# Altium PCB practus_floor.PcbDoc
Units mm, origin at the board's own origin, x right, y up, seen from the top; angles counter-clockwise.
Board outline 197.24 x 97.54 mm, 2 copper layers (Top Layer, Bottom Layer); 43 components, 20 nets, 181 pads, 10 vias.
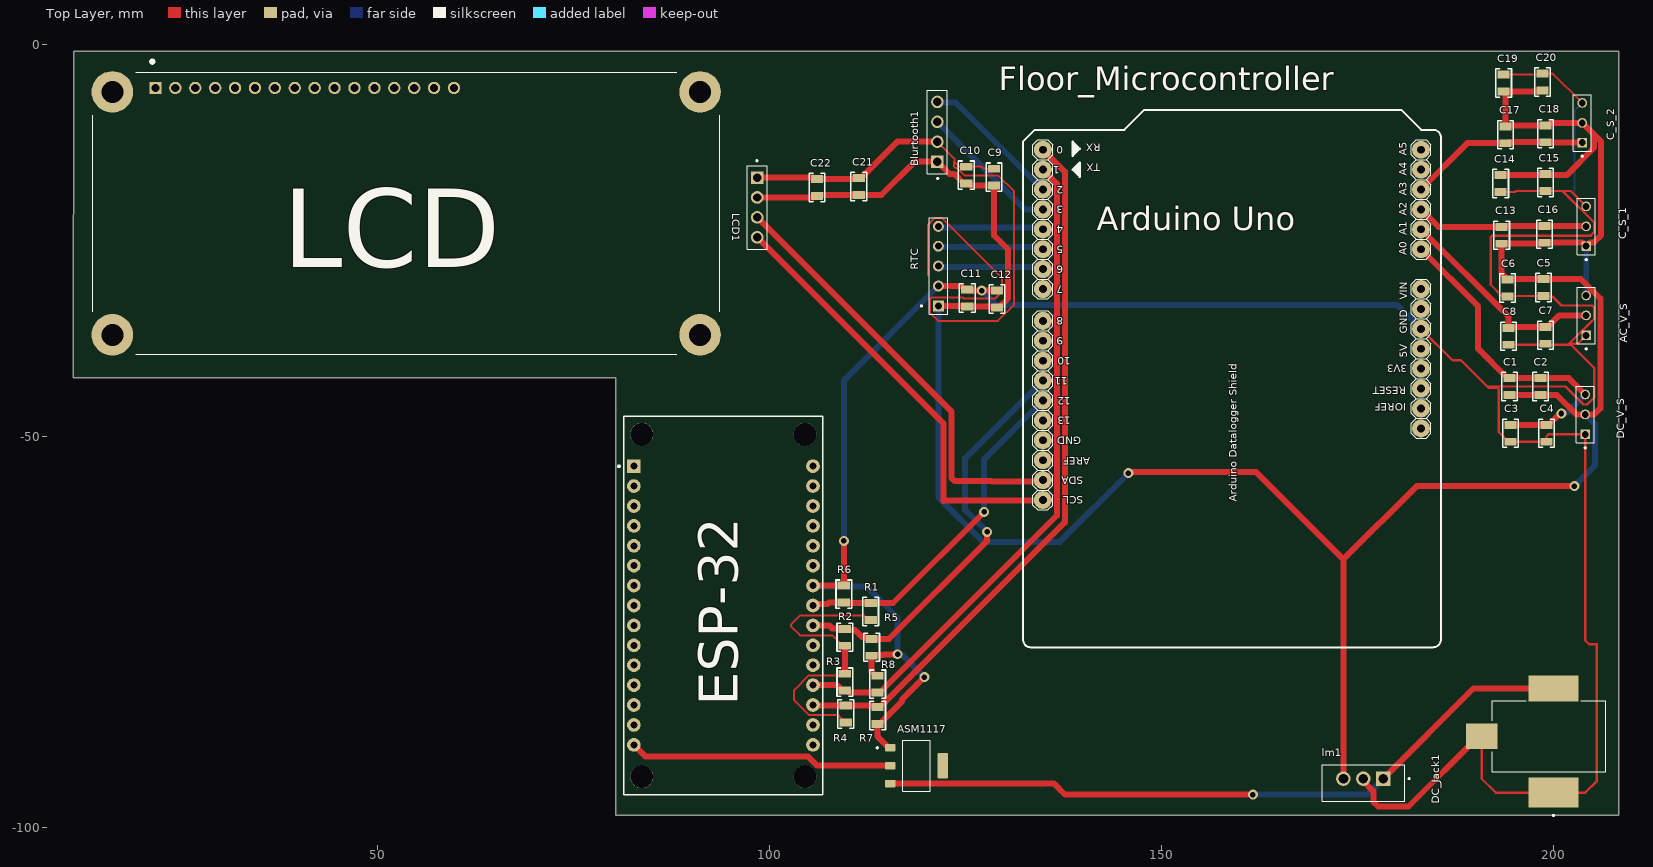
[diagram p0: Top Layer view]
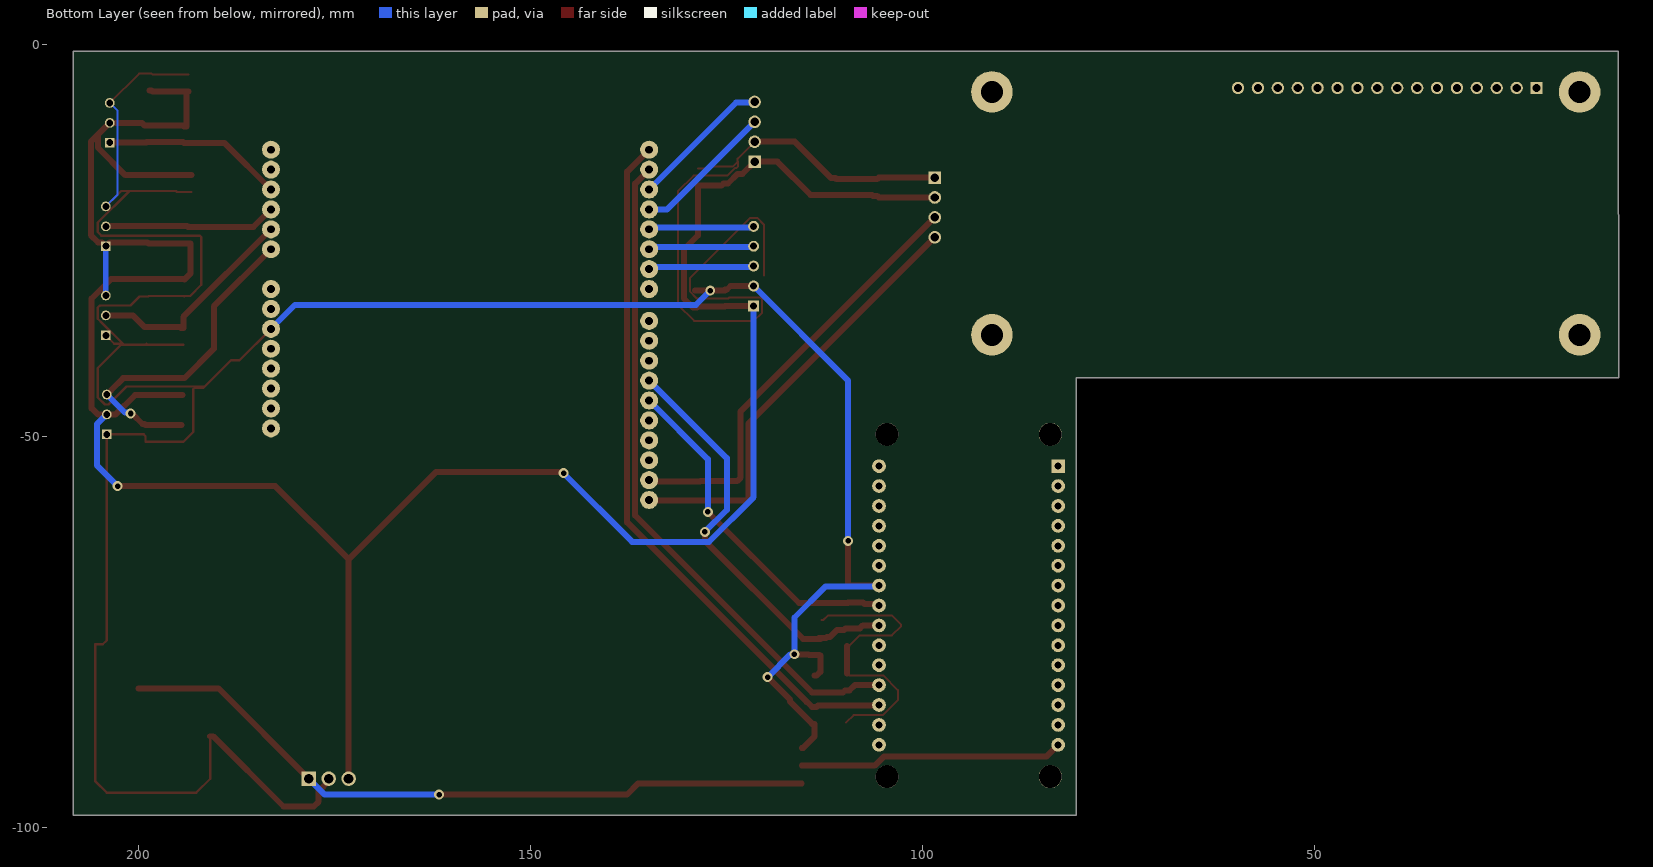
[diagram p1: Bottom Layer view, seen from below]
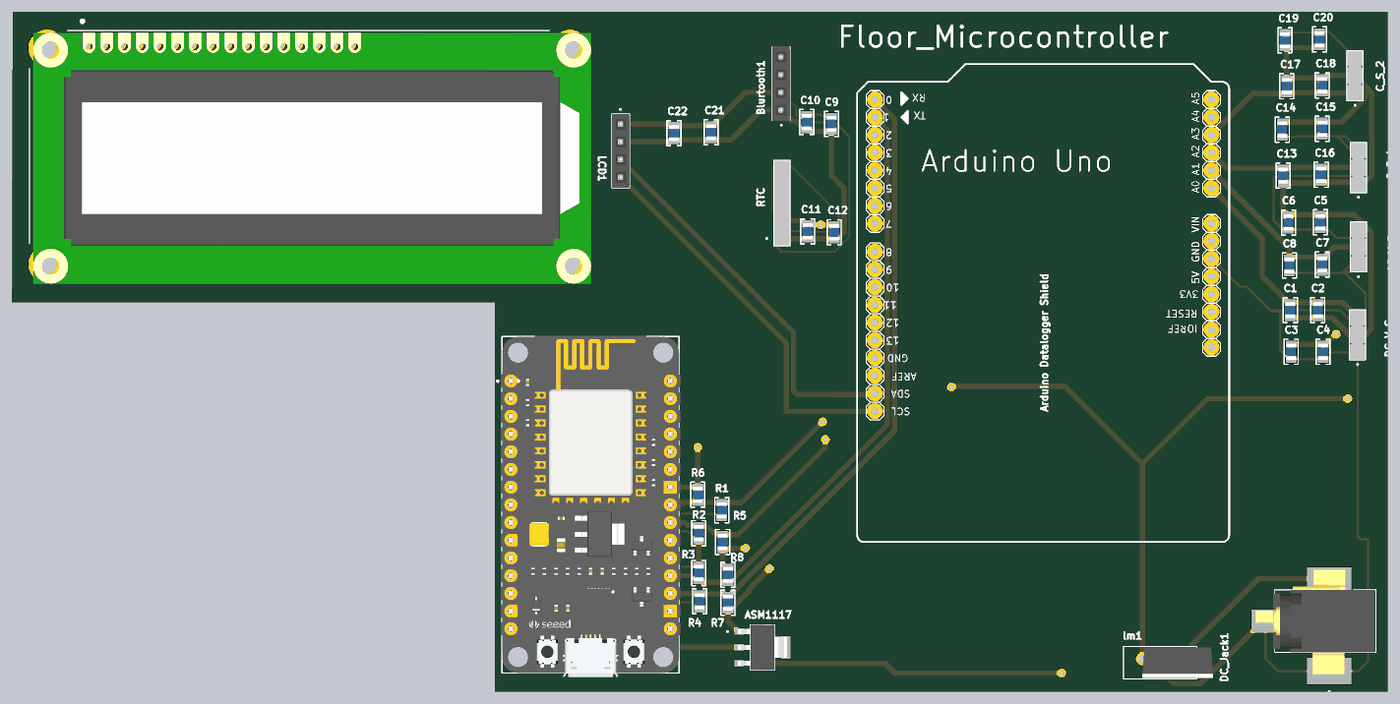
[diagram p2: 3D render of the assembled board from above, using the file's embedded part models]

## Layer stack, top to bottom
Top Solder: solder mask 0.0102, Solder Resist, Dk 3.5
Top Layer: signal copper 0.0356
Dielectric 1: dielectric 0.32, FR-4, Dk 4.8
Bottom Layer: signal copper 0.0356
Bottom Solder: solder mask 0.0102, Solder Resist, Dk 3.5

## Board outline
11.132,-42.561 80.376,-42.561 80.376,-98.425 208.376,-98.425 208.376,-0.889 11.225,-0.889

## Design rules (kind name [scope] priority, off if disabled: settings)
Clearance [All] p1: gap=0.254 ignorepadtopadclearanceinfootprint=TRUE except(0: Arc-Hole Track-Hole SMDPad-Hole THPad-Hole Via-Hole Fill-Hole Poly-Hole Region-Hole Text-Hole)
PolygonConnect [All] p1: connectstyle=Relief reliefconductorwidth=0.254 reliefentries=4 polygonreliefangle="90 Angle" airgapwidth=0.254
RoutingVias [All] p1: holewidth=0.711 width=1.27 viastyle="Through Hole" minholewidth=0.711 minwidth=1.27 maxholewidth=0.711 maxwidth=1.27
SolderMaskExpansion [All] p1: expansion=0.102 istentingtop=FALSE
Width [All] p1: maxlimit=0.762 minlimit=0.254 preferedwidth=0.254 minimp=50.000000 maximp=50.000000 favimp=50.000000
30 further rules are at their usual default settings.

## Components (designator, comment, footprint, x,y, rotation, side; value= is the part's Value field where it differs from the comment)
AC_V_S "5-146285-3" TE_5-146285-3 204.216,-37.152 r90 top
"Arduino Uno" "ARDUINO UNO" "ARDUINO UNO" 159.134,-40.905 r90 top
ASM1117 "AMS1117-3.3" SOT229P700X180-4N 118.745,-92.075 r0 top
Blurtooth1 "PPTC041LFBN-RC" SULLINS_PPTC041LFBN-RC 121.412,-11.176 r90 top
C1 "" 0805 194.437,-43.688 r90 top value=100pF
C2 "" 0805 198.374,-43.688 r90 top value=100pF
C3 "" 0805 194.564,-49.657 r90 top value=100pF
C4 "" 0805 199.136,-49.657 r90 top value=100pF
C5 "" 0805 198.755,-31.056 r270 top value=100pF
C6 "" 0805 194.183,-31.115 r270 top value=100pF
C7 "" 0805 199.009,-37.152 r270 top value=100pF
C8 "" 0805 194.31,-37.279 r270 top value=100pF
C9 "" 0805 128.651,-16.959 r270 top value=100pF
C10 "" 0805 125.095,-16.705 r270 top value=100pF
C11 "" 0805 125.222,-32.385 r90 top value=100pF
C12 "" 0805 129.032,-32.512 r90 top value=100pF
C13 "" 0805 193.421,-24.384 r270 top value=100pF
C14 "" 0805 193.294,-17.78 r90 top value=100pF
C15 "" 0805 199.009,-17.653 r90 top value=100pF
C16 "" 0805 198.882,-24.257 r270 top value=100pF
C17 "" 0805 193.929,-11.557 r270 top value=100pF
C18 "" 0805 199.009,-11.43 r270 top value=100pF
C19 "" 0805 193.675,-4.953 r270 top value=100pF
C20 "" 0805 198.628,-4.826 r270 top value=100pF
C21 "" 0805 111.379,-18.161 r90 top value=100pF
C22 "" 0805 106.045,-18.288 r90 top value=100pF
C_S_1 "5-146285-3" TE_5-146285-3 204.216,-25.781 r90 top
C_S_2 "5-146285-3" TE_5-146285-3 203.708,-12.573 r90 top
DC_Jack1 "RASM722X" SWITCHCRAFT_RASM722X 200.025,-88.314 r90 top
DC_V_S "5-146285-3" TE_5-146285-3 204.089,-49.784 r90 top
ESP-32 "113990105" FP-113990105-MFG 94.107,-71.628 r0 top (schematic designator nodemcu1)
LCD "Comment" LCD_NHD-14432WG-BTFH-V#T 54.179,-21.884 r0 top
LCD1 "PPTC041LFBN-RC" SULLINS_PPTC041LFBN-RC 98.425,-20.828 r270 top
lm1 "LM7805CT/NOPB" TO254P1054X470X2600-3 178.308,-93.726 r180 top
R1 "" 0805 112.903,-72.39 r270 top value=1K
R2 "" 0805 109.601,-75.692 r270 top value=1K
R3 "" 0805 109.601,-81.407 r90 top value=1K
R4 "" 0805 109.728,-85.471 r270 top value=1K
R5 "" 0805 113.03,-76.962 r90 top value=1K
R6 "" 0805 109.474,-70.172 r270 top value=1K
R7 "" 0805 113.792,-85.657 r90 top value=1K
R8 "" 0805 113.792,-81.661 r270 top value=1K
RTC "87224-5" TE_87224-5 121.539,-28.321 r90 top

## Footprints (in the part's own frame and the unit in brackets; to place one, negate y for a bottom-side part, rotate by r counter-clockwise, add the part's x,y. Pads: shape width x height; smd on the part's side, far side on the other; paste and mask are expansions set on the pad)
0805 [mm]
  rect 1x1.55 smd: 1(-1.075,0) 2(1.075,0)
  silkscreen extent -1.8,-1 1.8,1, body extent -1.15,-0.7 1.15,0.7, height 0.6
"ARDUINO UNO" [mm]
  round 2.3 hole 1: 0(27.44,24.26) 1(24.9,24.26) 2(22.36,24.26) 3(19.82,24.26) 3.3V(-0.5,-24) 4(17.28,24.26) 5(14.74,24.26) 5V(2.04,-24) 6(12.2,24.26) 7(9.66,24.26) 8(5.596,24.26) 9(3.056,24.26) 10(0.516,24.26) 11(-2.024,24.26) 12(-4.564,24.26) 13(-7.104,24.26) A0(14.74,-24) A1(17.28,-24) A2(19.82,-24) A3(22.36,-24) A4(24.9,-24) A5(27.44,-24) AREF(-12.184,24.26) GND1(7.12,-24) GND2(4.58,-24) GND3(-9.644,24.26) IOREF(-5.58,-24) NC(-8.12,-24) RST(-3.04,-24) SCL(-17.264,24.26) SDA(-14.724,24.26) Vin(9.66,-24)
  silkscreen extent -36.06,-26.54 32.52,26.8
FP-113990105-MFG [mil]
  rect 69.02x69.02 hole 35 paste-39370.1 mask+0: 1(-450,700)
  round 69.02 hole 35 paste-39370.1 mask+0: 2(-450,600) 3(-450,500) 4(-450,400) 5(-450,300) 6(-450,200) 7(-450,100) 8(-450,0) 9(-450,-100) 10(-450,-200) 11(-450,-300) 12(-450,-400) 13(-450,-500) 14(-450,-600) 15(-450,-700) 16(450,-700) 17(450,-600) 18(450,-500) 19(450,-400) 20(450,-300) 21(450,-200) 22(450,-100) 23(450,0) 24(450,100) 25(450,200) 26(450,300) 27(450,400) 28(450,500) 29(450,600) 30(450,700)
  round 115 hole 115 unplated paste-39370.1 mask+0: ""(-410,-860) ""(-410,860) ""(410,-860) ""(410,860)
  silkscreen extent -530,-950 500,950, body extent -511,-978 511,958, height 10
LCD_NHD-14432WG-BTFH-V#T [mm]
  rect 1.575x1.575 / inner round 1.575 / far side rect 1.575x1.575 hole 1.05: 1(-32.55,16.3)
  round 1.575 hole 1.05: 2(-30.01,16.3) 3(-27.47,16.3) 4(-24.93,16.3) 5(-22.39,16.3) 6(-19.85,16.3) 7(-17.31,16.3) 8(-14.77,16.3) 9(-12.23,16.3) 10(-9.69,16.3) 11(-7.15,16.3) 12(-4.61,16.3) 13(-2.07,16.3) 14(0.47,16.3) 15(3.01,16.3) 16(5.55,16.3)
  round 5.3 hole 2.8: S1(-38.05,15.8) S2(-38.05,-15.2) S3(36.95,15.8) S4(36.95,-15.2)
  silkscreen extent -40.55,-17.7 39.45,19.85, body extent -40,-18 40,18, height 10.2
SOT229P700X180-4N [mm]
  rrect15% 1.31x0.93 smd: 1(-3.345,2.29) 2(-3.345,0) 3(-3.345,-2.29)
  rrect15% 1.31x3.24 smd: 4(3.345,0)
  silkscreen extent -5.1,-3.25 1.75,3.25, body extent -3.5,-3.25 3.5,3.25, height 1.8
SULLINS_PPTC041LFBN-RC [mm]
  rect 1.605x1.605 / inner round 1.605 / far side rect 1.605x1.605 hole 1.07: 1(-3.81,0)
  round 1.605 hole 1.07: 2(-1.27,0) 3(1.27,0) 4(3.81,0)
  silkscreen extent -6.06,-1.27 5.33,1.27, body extent -5.33,-1.27 5.33,1.27, height 8.51
SWITCHCRAFT_RASM722X [mm]
  rect 3.81x6.35 smd: 1(-7.19,0)
  rect 3.3x4.06 smd: 2(0,9.14)
  rect 3.3x6.35 smd: 3(6.1,0)
  silkscreen extent -10.19,-6.7 4.5,7.81, body extent -7.6,-6.45 7.41,10.62, height 11.06
TE_5-146285-3 [mm]
  rect 1.24x1.24 hole 0.89: 1(0,0)
  round 1.24 hole 0.89: 2(2.54,0) 3(5.08,0)
  silkscreen extent -1.82,-1.17 6.15,1.17, body extent -1.07,-1.17 6.15,1.17, height 5.84
TE_87224-5 [mil]
  rect 55x55 hole 35: 1(-200,0)
  round 55 hole 35: 2(-100,0) 3(0,0) 4(100,0) 5(200,0)
  silkscreen extent -242,-46 242,89, body extent -242,-46 242,46, height 318
TO254P1054X470X2600-3 [mm]
  rect 1.86x1.86 / inner round 1.86 / far side rect 1.86x1.86 hole 1.24: 1(0,0)
  round 1.86 hole 1.24: 2(2.54,0) 3(5.08,0)
  silkscreen extent -3.41,-1.8 7.81,2.9, body extent -5.08,-1.64 5.08,2.72, height 20.4

## Part data
AC_V_S C_S_1 C_S_2 DC_V_S: Package=None, Availability=Unavailable, MP=5-146285-3, Price=None
ASM1117: "Sot223/Pkg 1-Amp 3.3-Volt Low Drop Out Voltage Regulatator", Package="SOT-223 Seeed Technology", Availability="Not in stock", Check_prices=https://www.snapeda.com/parts/AMS1117-3.3/Advanced+Monolithic+Systems/view-part/?ref=eda, MF="Advanced Monolithic Systems", MP=AMS1117-3.3, Price=None, SnapEDA_Link=https://www.snapeda.com/parts/AMS1117-3.3/Advanced+Monolithic+Systems/view-part/?ref=snap
Blurtooth1 LCD1: "4 Position Header Connector 0.100 (2.54mm) Through Hole Tin", Package=None, Check_prices=https://www.snapeda.com/parts/PPTC041LFBN-RC/Sullins+Connector+Solutions/view-part/?ref=eda, Digi-Key_Part_Number=S7002-ND, MF="Sullins Connector", MP=PPTC041LFBN-RC, Purchase-URL=https://pricing.snapeda.com/search/part/PPTC041LFBN-RC/?ref=eda, SnapEDA_Link=https://www.snapeda.com/parts/PPTC041LFBN-RC/Sullins+Connector+Solutions/view-part/?ref=snap
C1 C2 C3 C4 C5 C6 C7 C8 C9 C10 C11 C12 C13 C14 C15 C16 C17 C18 C19 C20 C21 C22: library part Cap, "Capacitor", LatestRevisionDate=17-Jul-2002, LatestRevisionNote="Re-released for DXP Platform.", PackageDescription="Radial Cap, Thru-Hole; 2 Leads; 0.3 in Pin Spacing", PackageReference=RAD-0.3, Published=8-Jun-2000, Publisher="Altium Limited"
DC_Jack1: "JACK SOCKET, DC; Gender:Jack; Current Rating:5A; Pin Diameter:2mm; Barrel Length:-; Connector Mounting:Surface Mount; Contact Termination Type:Solder; Barrel Inner Diameter:-; Barrel Outer Diameter:6.3mm; Voltage Rating:-; Product Range:-; SVHC:No SVHC (15-Jan-2018); Contact Termination:Solder; Termination Method:Solder; Voltage Rating VAC:250V", Package=None, Availability="In Stock", Check_prices=https://www.snapeda.com/parts/RASM722X/Switchcraft+Inc./view-part/?ref=eda, MF=Switchcraft, MP=RASM722X, Price=None, Purchase-URL=https://pricing.snapeda.com/search/part/RASM722X/?ref=eda, SnapEDA_Link=https://www.snapeda.com/parts/RASM722X/Switchcraft+Inc./view-part/?ref=snap
ESP-32: library part CMP-138991-000001-1, "NODEMCU V2 LUA BASED ESP8266 DEV", Frequency=2.4GHz, Series=-
lm1: "Linear Voltage Regulator IC Positive Fixed 1 Output 1.5A TO-220-3", Package="TO-220-3 ON Semiconductor", Availability="In Stock", Check_prices=https://www.snapeda.com/parts/LM7805CT/Onsemi/view-part/?ref=eda, MF="ON Semiconductor", MP=LM7805CT, Price=None, Purchase-URL=https://pricing.snapeda.com/search/part/LM7805CT/?ref=eda, SnapEDA_Link=https://www.snapeda.com/parts/LM7805CT/Onsemi/view-part/?ref=snap
R1 R2 R3 R4 R5 R6 R7 R8: library part Res1, "Resistor", LatestRevisionDate=17-Jul-2002, LatestRevisionNote="Re-released for DXP Platform.", PackageDescription="Axial Device, Thru-Hole; 2 Leads; 0.3 in Pin Spacing", PackageReference=AXIAL-0.3, Published=8-Jun-2000, Publisher="Altium Limited"
RTC: "Conn Unshrouded Header HDR 5 POS 2.54mm Solder ST Thru-Hole", Package=None, Availability=Good, Centerline_Pitch="2.54 mm[.1 in]", EU_RoHS_Compliance=Compliant, MF="TE Connectivity", MP=87224-5, Number_of_Positions=5, Price=None, Product_Type=Connector, Purchase-URL=https://pricing.snapeda.com/search/part/87224-5/?ref=eda, SnapEDA_Link=https://www.snapeda.com/parts/87224-5/TE%20Connectivity%20AMP%20Connectors/view-part/1233389/?ref=snap

## Via types
v1: diameter 1.27, hole 0.711, Top Layer to Bottom Layer, 10 vias

## Nets (pads, with @x,y where several pads share a name; then routed paths per layer and width w, separated by ;. In a path a pad name is that pad's centre, name@x,y a point inside that pad or via, vN(x,y) a via of type N, cw(c..) or ccw(c..) an arc to the next point about the centre after c; other vN are vias at no path point)
5v: AC_V_S.3 Blurtooth1.1 C1.1 C2.1 C5.1 C6.1 C9.2 C10.2 C11.1 C12.1 C13.2 C14.2 C15.2 C16.2 C17.1 C18.1 C19.2 C20.2 C21.1 C22.1 C_S_1.1 C_S_2.2 DC_V_S.2 LCD1.2 lm1.3 RTC.1 | length 331.2
  Top Layer w0.762: LCD1.2 105.575,-19.558 105.77,-19.363 C22.1 106.32,-19.363 106.447,-19.236 C21.1 114.257,-19.236 118.507,-14.986 Blurtooth1.1 122.96,-16.534 123.574,-16.534 124.82,-17.78 C10.2 125.37,-17.78 125.624,-18.034 C9.2 128.651,-24.407 130.442,-26.198 130.442,-32.452 129.307,-33.587 C12.1 128.757,-33.587 128.63,-33.46 C11.1 125.193,-33.43 121.569,-33.43 RTC.1 ; v1(145.796,-54.737) 145.923,-54.61 162.089,-54.61 173.228,-65.749 ; lm1.3 173.228,-65.749 ; C14.2 201.714,-16.705 205.232,-13.187 205.232,-11.557 ; C19.2 C19.2@193.81,-6.028 ; C1.1 C2.1 200.465,-44.763 202.946,-47.244 205.232,-47.244 206.017,-46.459 206.017,-35.369 206.025,-35.361 206.025,-33.863 206.017,-33.855 206.017,-32.457 203.541,-29.981 C5.1 194.242,-29.981 C6.1 193.421,-29.278 C13.2 198.755,-25.459 C16.2 203.767,-25.332 C_S_1.1 204.709,-25.288 205.208,-25.288 206.121,-24.375 206.121,-12.446 205.232,-11.557 ; C20.2 198.353,-5.901 198.226,-6.028 C19.2@193.81,-6.028 ; v1(202.692,-56.388) 182.589,-56.388 173.228,-65.749 ; C19.2@193.81,-6.028 193.929,-6.147 C17.1 194.204,-10.482 194.331,-10.355 C18.1 199.284,-10.355 199.606,-10.033 C_S_2.2 205.232,-11.557
  Bottom Layer w0.762: RTC.1 121.539,-57.803 127.236,-63.5 137.033,-63.5 v1(145.796,-54.737) ; v1(202.692,-56.388) 205.344,-53.736 205.344,-48.499 DC_V_S.2 ; AC_V_S.3 C_S_1.1
GND: "Arduino Uno.GND2" AC_V_S.1 ASM1117.1 Blurtooth1.2 C3.1 C4.1 C5.2 C6.2 C7.2 C8.2 C9.1 C10.1 C11.2 C12.2 C14.1 C15.1 C19.1 C20.1 C21.2 C22.2 C_S_1.3 C_S_2.3 DC_Jack1.1 DC_Jack1.2 DC_V_S.1 ESP-32.24 LCD1.1 lm1.2 R5.1 R6.1 R7.1 R8.1 RTC.2 | length 493.7
  Top Layer w0.254: 120.218,-29.54 120.218,-23.035 121.092,-22.162 121.986,-22.162 129.68,-29.855 129.68,-31.551 128.778,-32.453 124.796,-32.453 124.665,-32.322 120.683,-32.322 120.459,-32.545 120.459,-34.257 121.508,-35.306 129.127,-35.306 131.204,-33.229 131.204,-18.773 129.196,-16.765 124.883,-16.765 123.89,-15.772 123.707,-15.772 123.566,-15.632 123.566,-14.991 124.206,-15.63 ; Blurtooth1.2 123.571,-14.605 123.571,-14.986 ; 124.215,-15.63 C10.1 127.076,-15.63 127.33,-15.884 C9.1 ; C11.2@125.222,-31.437 C11.2 ; C19.1 198.222,-3.878 198.349,-3.751 C20.1 199.966,-3.751 C_S_2.3
  Top Layer w0.3: 183.134,-36.325 187.145,-40.335 188.239,-40.335 191.592,-43.688 ; DC_Jack1.2 190.885,-93.726 192.663,-95.504 DC_Jack1.1 204.089,-95.504 205.572,-94.021 205.572,-76.585 204.597,-76.585 204.089,-76.077 DC_V_S.1 199.39,-49.784 199.136,-50.038 C4.1 C3.1 194.289,-50.732 193.04,-49.483 193.04,-44.042 192.864,-43.866 191.77,-43.866 191.592,-43.688 ; C14.1 195.123,-18.855 195.25,-18.728 C15.1 201.202,-18.728 ; C6.2 C6.2@194.242,-32.131 ; C8.2 C7.2@199.009,-38.354 ; C5.2@198.755,-32.19 199.906,-32.19 201.066,-33.35 204.963,-33.35 205.232,-33.619 205.232,-34.18 205.24,-34.188 205.24,-35.036 204.64,-35.636 204.623,-35.636 202.032,-38.227 ; C5.2 C6.2@194.242,-32.131 ; C7.2 C7.2@199.009,-38.354 ; 202.032,-38.354 202.26,-38.354 205.232,-41.326 205.232,-45.07 204.328,-45.974 203.85,-45.974 201.564,-43.688 191.592,-43.688 ; AC_V_S.1 203.141,-38.227 202.032,-38.227 ; C_S_1.3 202.243,-18.728 201.202,-18.728 ; C6.2@194.242,-32.131 193.446,-32.131 192.024,-30.709 192.024,-24.611 192.2,-24.435 197.933,-24.435 197.94,-24.428 199.824,-24.428 199.831,-24.435 204.775,-24.435 205.24,-23.97 205.24,-22.766 201.202,-18.728 ; C7.2@199.009,-38.354 201.905,-38.354 202.032,-38.227
  Top Layer w0.762: LCD1.1 105.575,-17.018 105.77,-17.213 C22.2 110.977,-17.213 111.104,-17.086 C21.2 111.654,-17.086 116.294,-12.446 Blurtooth1.2 ; ESP-32.24 105.542,-69.093 109.469,-69.093 R6.1 v1(109.474,-63.373) ; R8.1 113.517,-80.586 113.03,-80.099 R5.1 113.149,-77.918 114.487,-77.918 114.554,-77.851 v1(116.332,-77.851) ; ASM1117.1 115.21,-89.785 113.792,-88.367 R7.1 114.067,-86.732 116.891,-83.908 116.891,-83.633 v1(119.761,-80.763) ; RTC.2 124.498,-30.861 124.947,-31.31 C11.2 ; C11.2@125.222,-31.437 v1(127.076,-31.437) C12.2 ; lm1.2 175.768,-94.023 177.056,-95.311 177.056,-96.665 177.673,-97.282 181.537,-97.282 190.505,-88.314 DC_Jack1.2
  Bottom Layer w0.254: C_S_2.3 202.692,-8.509 202.692,-19.177 C_S_1.3
  Bottom Layer w0.762: ESP-32.24 105.662,-69.213 112.393,-69.213 116.332,-73.152 v1(116.332,-77.851) 116.849,-77.851 v1(119.761,-80.763) ; v1(109.474,-63.373) 109.474,-42.926 RTC.2 ; v1(127.076,-31.437) 128.913,-33.274 180.083,-33.274 183.134,-36.325
NetAC_V_S_2: "Arduino Uno.A1" AC_V_S.2 C7.1 C8.1 | length 27.8
  Top Layer w0.762: 183.134,-23.625 194.31,-34.801 C8.1 194.585,-36.204 194.712,-36.077 C7.1 199.284,-36.077 200.749,-34.612 AC_V_S.2
"NetArduino Uno_0": "Arduino Uno.0" ESP-32.18 R4.1 R7.2 | length 90.7
  Top Layer w0.762: ESP-32.18 105.571,-84.362 109.694,-84.362 R4.1 113.331,-84.396 113.517,-84.582 R7.2 114.067,-84.582 114.725,-83.924 114.777,-83.924 137.675,-61.026 137.675,-16.266 134.874,-13.465
"NetArduino Uno_1": "Arduino Uno.1" ESP-32.19 R3.1 R8.2 | length 85.8
  Top Layer w0.762: ESP-32.19 108.632,-81.788 109.326,-82.482 R3.1 109.876,-82.482 110.13,-82.736 R8.2 114.067,-82.736 136.659,-60.144 136.659,-17.79 134.874,-16.005
"NetArduino Uno_2": "Arduino Uno.2" Blurtooth1.4 | length 18.1
  Bottom Layer w0.762: Blurtooth1.4 121.49,-7.444 123.774,-7.444 134.874,-18.545
"NetArduino Uno_3": "Arduino Uno.3" Blurtooth1.3 | length 18.1
  Bottom Layer w0.762: Blurtooth1.3 132.581,-21.075 134.864,-21.075 134.874,-21.085
"NetArduino Uno_4": "Arduino Uno.4" RTC.5 | length 13.5
  Bottom Layer w0.762: RTC.5 121.661,-23.363 134.612,-23.363 134.874,-23.625
"NetArduino Uno_5": "Arduino Uno.5" RTC.4 | length 13.5
  Bottom Layer w0.762: RTC.4 121.661,-25.903 134.612,-25.903 134.874,-26.165
"NetArduino Uno_6": "Arduino Uno.6" RTC.3 | length 13.5
  Bottom Layer w0.762: RTC.3 121.661,-28.443 134.612,-28.443 134.874,-28.705
"NetArduino Uno_11": "Arduino Uno.11" ESP-32.22 R2.1 R5.2 | length 54.1
  Top Layer w0.762: ESP-32.22 107.607,-74.168 107.981,-74.542 109.801,-74.542 109.995,-74.736 110.871,-74.736 111.767,-75.632 112.15,-75.632 112.286,-75.768 113.186,-75.768 R5.2@113.305,-75.887 ; R5.2 115.248,-75.887 127.762,-63.373 v1(127.762,-62.23)
  Bottom Layer w0.762: v1(127.762,-62.23) 124.968,-59.436 124.968,-52.835 134.874,-42.929
"NetArduino Uno_12": "Arduino Uno.12" ESP-32.23 R1.1 R6.2 | length 44.2
  Top Layer w0.762: ESP-32.23 105.727,-71.438 107.365,-71.438 107.556,-71.247 R6.2 109.508,-71.281 112.869,-71.281 R1.1 115.756,-71.315 v1(127.381,-59.69)
  Bottom Layer w0.762: v1(127.381,-59.69) 127.381,-52.962 134.874,-45.469
"NetArduino Uno_A0": "Arduino Uno.A0" C1.2 C2.2 C3.2 C4.2 DC_V_S.3 | length 42.3
  Top Layer w0.762: 183.134,-26.165 190.414,-33.444 190.414,-38.865 194.162,-42.613 C1.2 C2.2 201.998,-42.613 203.552,-44.167 ; C3.2 C4.2 199.255,-48.463 199.53,-48.463 200.77,-47.223 200.935,-47.223 v1(201.032,-47.126) ; DC_V_S.3@203.981,-44.812 DC_V_S.3
  Bottom Layer w0.762: v1(201.032,-47.126) 201.129,-47.029 201.764,-47.029 DC_V_S.3
"NetArduino Uno_A2": "Arduino Uno.A2" C13.1 C16.1 C_S_1.2 | length 22.1
  Top Layer w0.762: 183.134,-21.085 185.358,-23.309 C13.1 193.696,-23.309 193.823,-23.182 C16.1 198.912,-23.211 204.187,-23.211 C_S_1.2
"NetArduino Uno_A3": "Arduino Uno.A3" C17.2 C18.2 C_S_2.1 | length 23.1
  Top Layer w0.762: 183.134,-18.545 189.047,-12.632 C17.2 194.204,-12.632 194.331,-12.505 C18.2 199.043,-12.539 203.674,-12.539 C_S_2.1
"NetArduino Uno_SCL": "Arduino Uno.SCL" LCD1.4 | length 56.2
  Top Layer w0.762: LCD1.4 122.174,-48.387 122.174,-58.293 122.236,-58.231 134.812,-58.231 134.874,-58.169
"NetArduino Uno_SDA": "Arduino Uno.SDA" LCD1.3 | length 55.4
  Top Layer w0.762: LCD1.3 123.19,-46.863 123.19,-55.307 123.636,-55.753 128.331,-55.753 128.396,-55.818 134.685,-55.818 134.874,-55.629
NetASM1117_2: ASM1117.2 ESP-32.15 | length 33.8
  Top Layer w0.762: ESP-32.15 84.189,-90.92 86.868,-90.92 104.932,-90.92 106.087,-92.075 ASM1117.2
NetASM1117_3: ASM1117.3 DC_Jack1.3 lm1.1 | length 90.9
  Top Layer w0.762: ASM1117.3 136.308,-94.365 137.701,-95.758 v1(161.671,-95.758) v1@161.798,-95.758 ; lm1.1 189.82,-82.214 DC_Jack1.3
  Bottom Layer w0.762: v1(161.671,-95.758) 176.276,-95.758 lm1.1
VCC: R1.2 R2.2 R3.2 R4.2 | length 39
  Top Layer w0.254: R3.2 109.403,-80.53 105.016,-80.53 103.124,-82.423 103.124,-83.693 105.041,-85.61 108.793,-85.61 R4.2 ; R2.2 109.326,-76.767 108.01,-75.45 103.898,-75.45 102.721,-74.273 102.721,-74.063 103.874,-72.91 112.074,-72.91 112.628,-73.465 R1.2
  Top Layer w0.762: R3.2 R2.2
pads on no net: "Arduino Uno.3.3V" "Arduino Uno.5V" "Arduino Uno.7" "Arduino Uno.8" "Arduino Uno.9" "Arduino Uno.10" "Arduino Uno.13" "Arduino Uno.A4" "Arduino Uno.A5" "Arduino Uno.AREF" "Arduino Uno.GND1" "Arduino Uno.GND3" "Arduino Uno.IOREF" "Arduino Uno.NC" "Arduino Uno.RST" "Arduino Uno.Vin" ASM1117.4 ESP-32. ESP-32.1 ESP-32.2 ESP-32.3 ESP-32.4 ESP-32.5 ESP-32.6 ESP-32.7 ESP-32.8 ESP-32.9 ESP-32.10 ESP-32.11 ESP-32.12 ESP-32.13 ESP-32.14 ESP-32.16 ESP-32.17 ESP-32.20 ESP-32.21 ESP-32.25 ESP-32.26 ESP-32.27 ESP-32.28 ESP-32.29 ESP-32.30 LCD.1 LCD.2 LCD.3 LCD.4 LCD.5 LCD.6 LCD.7 LCD.8 LCD.9 LCD.10 LCD.11 LCD.12 LCD.13 LCD.14 LCD.15 LCD.16 LCD.S1 LCD.S2 LCD.S3 LCD.S4
copper on no net: | length 0.4
  Top Layer w0.254: 183.134,-38.865 183.137,-38.865 183.388,-39.116

## Silkscreen, mask and mechanical layers (free items; w line width, h text height)
Top Overlay:
  text "Floor_Microcontroller" at 129.259,-5.877 h3

## Text inside footprints (layer, text, board x,y; h text height)
"Arduino Uno": Top Overlay "Arduino Datalogger Shield" at 159.634,-58.405 h1 r90; Top Overlay "SDA" at 140.047,-55.176 h1 r180; Top Overlay "SCL" at 140.034,-57.705 h1 r180; Top Overlay "0" at 137.458,-13.018 h1 r180; Top Overlay "1" at 137.055,-15.558 h1 r180; Top Overlay "2" at 137.458,-18.098 h1 r180; Top Overlay "3" at 137.458,-20.638 h1 r180; Top Overlay "4" at 137.458,-23.178 h1 r180; Top Overlay "5" at 137.458,-25.718 h1 r180; Top Overlay "6" at 137.458,-28.258 h1 r180; Top Overlay "7" at 137.458,-30.798 h1 r180; Top Overlay "8" at 137.458,-34.862 h1 r180; Top Overlay "9" at 137.458,-37.402 h1 r180; Top Overlay "10" at 138.465,-39.942 h1 r180; Top Overlay "11" at 138.062,-42.482 h1 r180; Top Overlay "12" at 138.465,-45.022 h1 r180; Top Overlay "13" at 138.465,-47.562 h1 r180; Top Overlay "RX" at 142.24,-12.703 h1 r180; Top Overlay "TX" at 142.215,-15.243 h1 r180; Top Overlay "IOREF" at 181.229,-45.85 h1 r180; Top Overlay "GND" at 181.356,-36.934 h1 r90; Top Overlay "VIN" at 181.356,-32.642 h1 r90; Top Overlay "A5" at 181.331,-14.252 h1 r90; Top Overlay "A4" at 181.331,-16.792 h1 r90; Top Overlay "A3" at 181.331,-19.332 h1 r90; Top Overlay "A2" at 181.331,-21.872 h1 r90; Top Overlay "A1" at 181.331,-24.412 h1 r90; Top Overlay "3V3" at 181.356,-40.897 h1 r180; Top Overlay "RESET" at 181.229,-43.691 h1 r180; Top Overlay "GND" at 139.748,-50.077 h1 r180; Top Overlay "AREF" at 140.931,-52.718 h1 r180; Top Overlay "A0" at 181.331,-26.952 h1 r90; Top Overlay "5V" at 181.356,-40.008 h1 r90
DC_Jack1: Mechanical 13 ">PCB EDGE" at 167.386,-78.408 h1 r90